# EAGLE board specMech - Copy (2) (EAGLE 9.6.2)
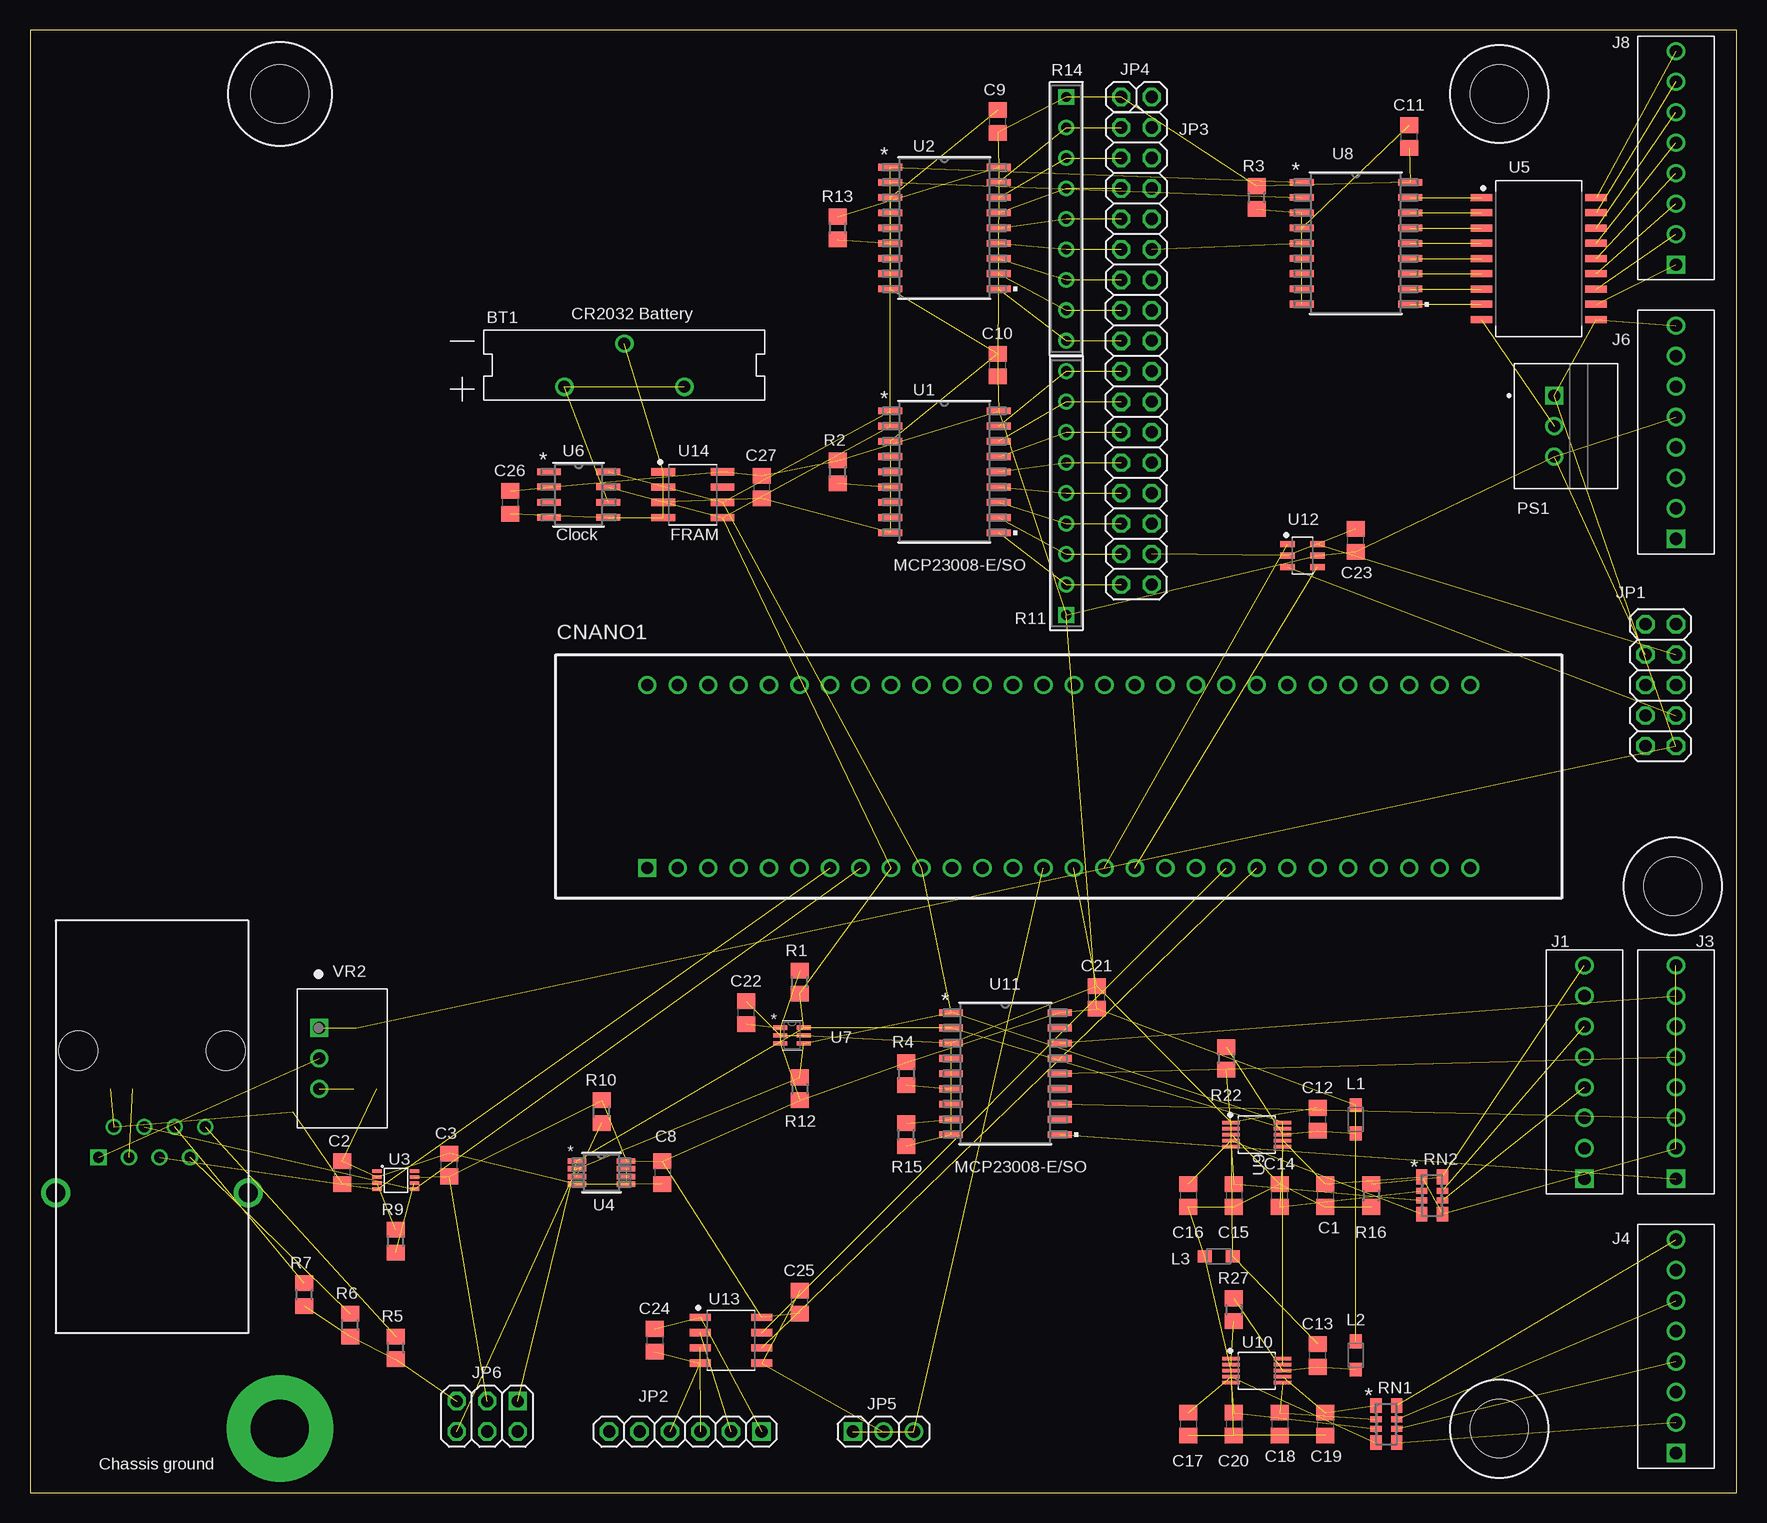
[diagram p0: board, top side]
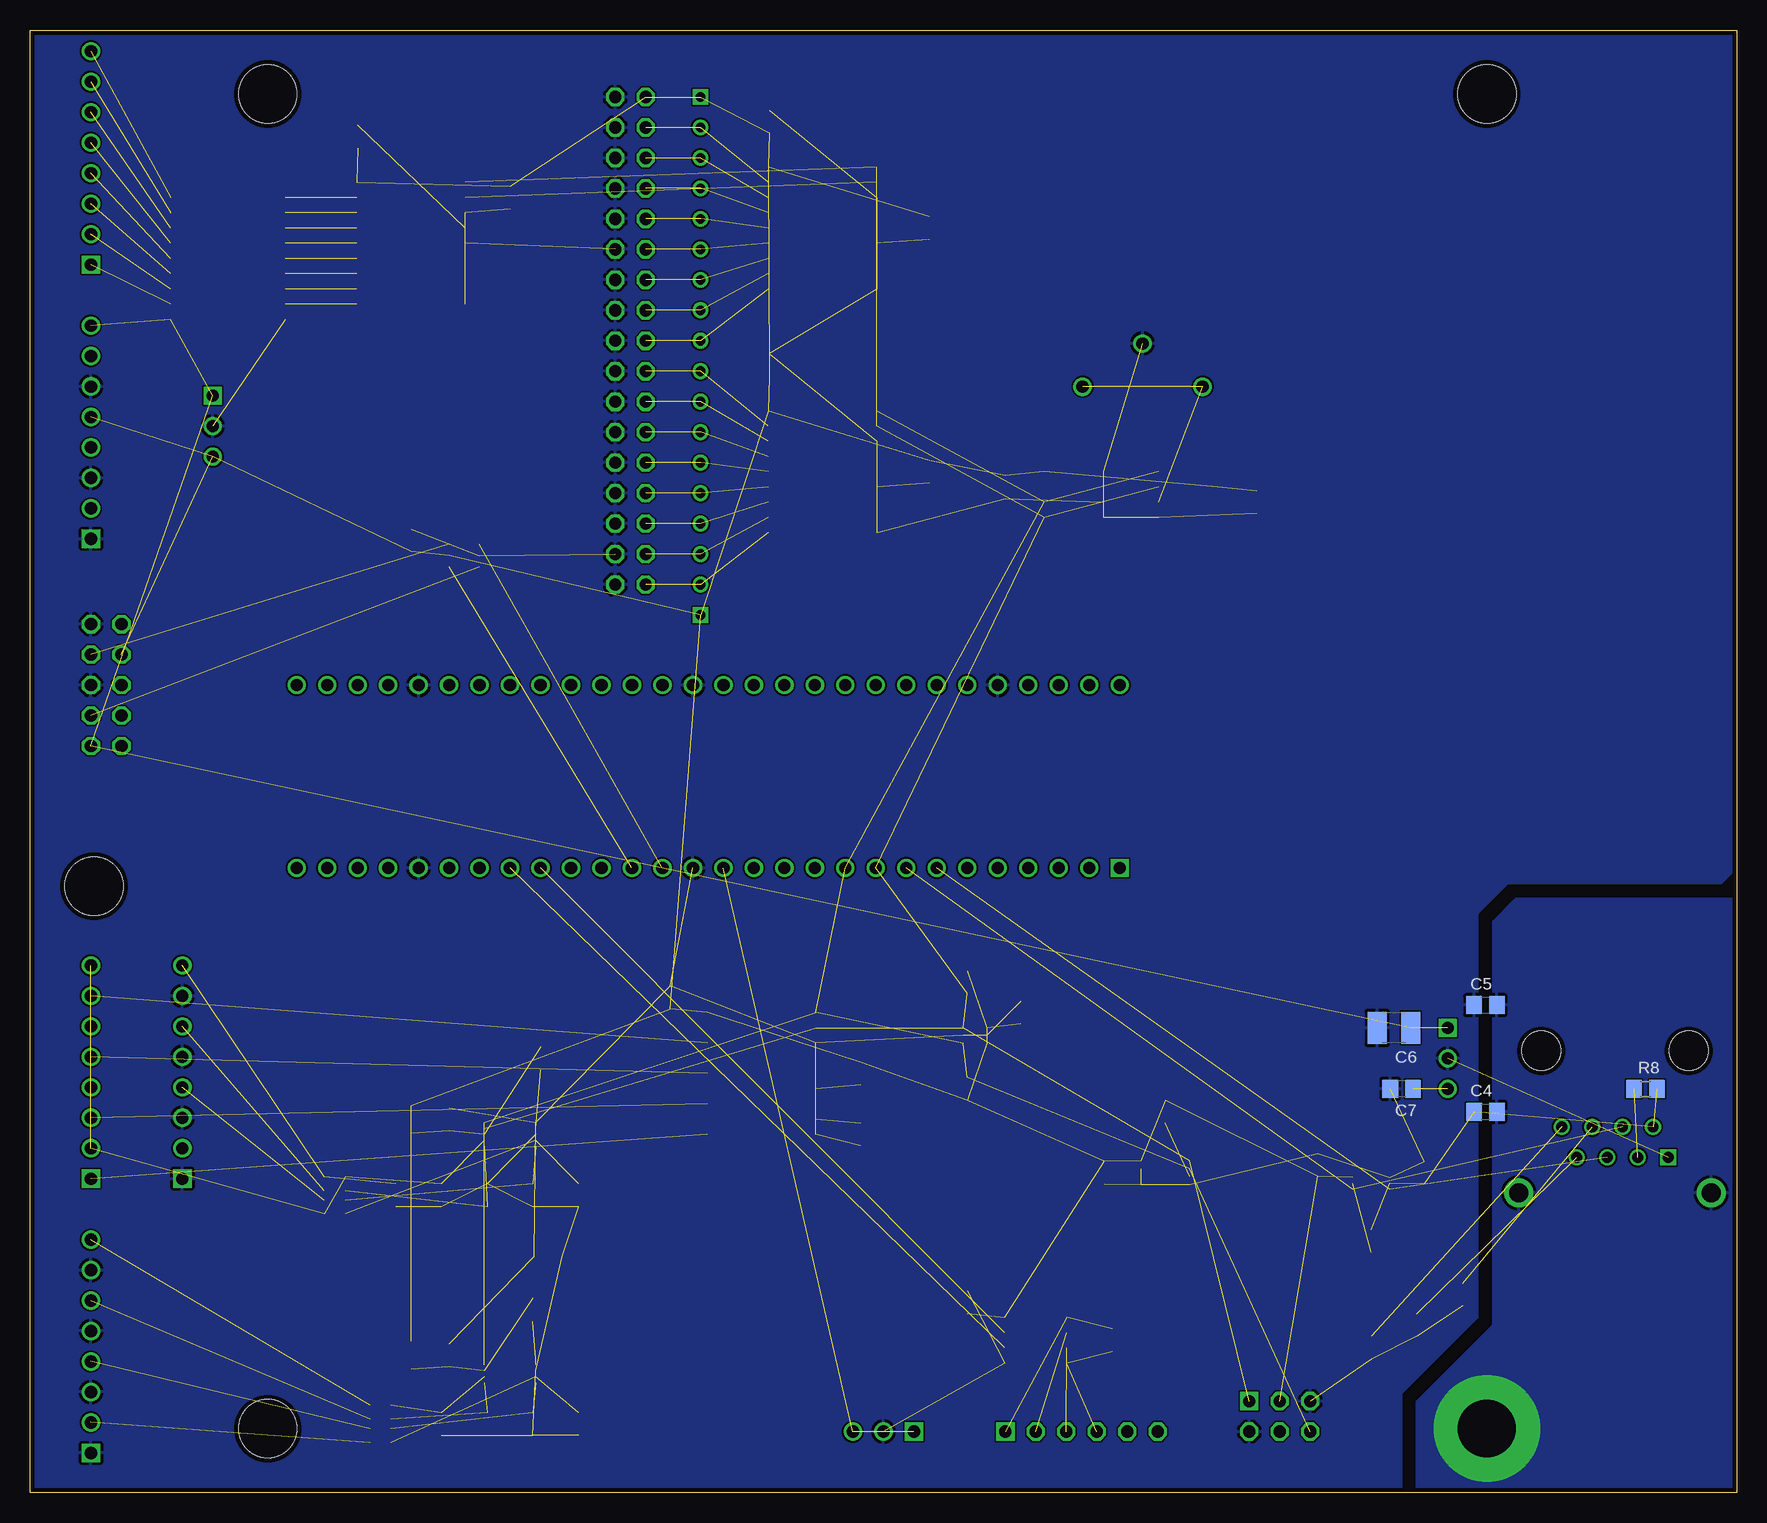
[diagram p1: board, bottom side, seen from below]

Size 142.24 x 121.92 mm. Coordinates in mm from the lower left corner, seen from the top.
Outline: 0,0 142.24,0 142.24,121.92 0,121.92 0,0
Copper layers (1*16): Top 0.035559375mm / dielectric 1.6mm / Bottom 0.035559375mm
Design rules "oshpark-2layer": minimum track width 6mil, minimum drill 10mil, track to track 6mil, track to pad 6mil, pad to pad 6mil, via to via 6mil, smd to smd 6mil, copper to edge 15mil, drill to drill 6mil, minimum pad ring 5mil, minimum via ring 5mil, stop-mask expansion 2.5mil, vias tented up to drill 0mil, thermal gap 10mil
Holes 4.83 mm at 122.43,5.33 136.91,50.55 122.43,116.59 20.83,116.59
tKeepout: area 16,0.5 to 25.7,10.2
bKeepout: area 16,0.5 to 25.7,10.2

## Footprints (pad centres in the part's own frame; a part is rotated, then mirrored left to right if it is on the bottom)
BAT_BK-5058 = drill 1.02: - 0,1.8; S+1 -5,-1.8; S+2 5,-1.8
C0805 = smd 1.3 x 1.5: 1 -0.95,0; 2 0.95,0
C1210 = smd 1.6 x 2.7: 1 -1.4,0; 2 1.4,0
CURIOSITYNANO4809 = drill 1.016: GND15 -7.62,-1.27; GND24 -7.62,-24.13; GND33 7.62,-24.13; GND42 7.62,-1.27; GND52 7.62,24.13; ID -7.62,31.75; PA0-TX -7.62,19.05; PA1-RX -7.62,16.51; PA2-SDA -7.62,13.97; PA3-SCL -7.62,11.43; PA4-MOSI -7.62,8.89; PA5-MISO -7.62,6.35; PA6-SCK -7.62,3.81; PA7-SS -7.62,1.27; PB0-RX -7.62,29.21; PB0-TX -7.62,-13.97; PB1-RX -7.62,-16.51; PB1-TX -7.62,26.67; PB2 -7.62,-19.05; PB3 -7.62,-21.59; PB4 7.62,-21.59; PB5 7.62,-19.05; PC0-TX -7.62,-3.81; PC1-RX -7.62,-6.35; PC2 -7.62,-8.89; PC3 -7.62,-11.43; PC4 7.62,-11.43; PC5 7.62,-8.89; PC6 7.62,-6.35; PC7 7.62,-3.81; PD0-AIN0 7.62,1.27; PD1-AIN1 7.62,3.81; PD2-AIN2 7.62,6.35; PD3-AIN3 7.62,8.89; PD4-AIN4 7.62,11.43; PD5-AIN5 7.62,13.97; PD6-AIN6 7.62,16.51; PD7-AIN7 7.62,19.05; PE0 -7.62,-26.67; PE1 -7.62,-29.21; PE2 -7.62,-31.75; PE3 -7.62,-34.29; PF0-TOSC1 7.62,-16.51; PF1-TOSC2 7.62,-13.97; PF2 7.62,-34.29; PF2-6 -7.62,21.59; PF3 7.62,-31.75; PF3-5 -7.62,24.13; PF4 7.62,-29.21; PF5-LED 7.62,-26.67; PF6-SW0 7.62,29.21; UPDI 7.62,26.67; VBUS 7.62,34.29; VOFF 7.62,31.75; VTG 7.62,21.59 | drill 1.016 square: NC -7.62,34.29
1X08-MOLEX-SHROUD = drill 1.016 square: P$1 0,8.89 | drill 1.016: P$2 0,6.35; P$3 0,3.81; P$4 0,1.27; P$5 0,-1.27; P$6 0,-3.81; P$7 0,-6.35; P$8 0,-8.89
XPORT-2 = drill 0.9: 3.3V 0,-3.175; /RST 2.54,-1.905; CP1 0,1.905; CP2 2.54,3.175; CP3 0,4.445; RX 2.54,0.635; TX 0,-0.635 | drill 0.9 square: GND 2.54,-4.445 | drill 1.6: P$1 5.5,8.025; P$2 5.5,-8.025 | hole 3.25: -6.35,6.15; -6.35,-6.15
2X05 = drill 1.016 octagon: 1 -5.08,-1.27; 2 -5.08,1.27; 3 -2.54,-1.27; 4 -2.54,1.27; 5 0,-1.27; 6 0,1.27; 7 2.54,-1.27; 8 2.54,1.27; 9 5.08,-1.27; 10 5.08,1.27
1X06 = drill 1.016 square: 1 -6.35,0 | drill 1.016 octagon: 2 -3.81,0; 3 -1.27,0; 4 1.27,0; 5 3.81,0; 6 6.35,0
2X16 = drill 1.016 octagon: 1 -19.05,-1.27; 2 -19.05,1.27; 3 -16.51,-1.27; 4 -16.51,1.27; 5 -13.97,-1.27; 6 -13.97,1.27; 7 -11.43,-1.27; 8 -11.43,1.27; 9 -8.89,-1.27; 10 -8.89,1.27; 11 -6.35,-1.27; 12 -6.35,1.27; 13 -3.81,-1.27; 14 -3.81,1.27; 15 -1.27,-1.27; 16 -1.27,1.27; 17 1.27,-1.27; 18 1.27,1.27; 19 3.81,-1.27; 20 3.81,1.27; 21 6.35,-1.27; 22 6.35,1.27; 23 8.89,-1.27; 24 8.89,1.27; 25 11.43,-1.27; 26 11.43,1.27; 27 13.97,-1.27; 28 13.97,1.27; 29 16.51,-1.27; 30 16.51,1.27; 31 19.05,-1.27; 32 19.05,1.27
1X02 = drill 1.016 octagon: 1 -1.27,0; 2 1.27,0
1X03 = drill 1.016 square: 1 -2.54,0 | drill 1.016: 2 0,0; 3 2.54,0
2X03 = drill 1.016 square: 1 -2.54,-1.27 | drill 1.016 octagon: 2 -2.54,1.27; 3 0,-1.27; 4 0,1.27; 5 2.54,-1.27; 6 2.54,1.27
INDC2012X87N = smd 1.15 x 1: 1 -1.175,0; 2 1.175,0
CONV_OKI-78SR-5/1.5-W36-C = drill 1 pad 1.5 square: 1 -2.54,0 | drill 1 pad 1.5: 2 0,0; 3 2.54,0
R0805 = smd 1.3 x 1.5: 1 -0.95,0; 2 0.95,0
BO_4609X = drill 0.813 pad 1.321 square: 1 0,0 | drill 0.813 pad 1.321: 2 2.54,0; 3 5.08,0; 4 7.62,0; 5 10.16,0; 6 12.7,0; 7 15.24,0; 8 17.78,0; 9 20.32,0
EXB38V_PAN = smd 0.94 x 1.219: 1 -0.864,1.549; 4 -0.864,-1.549; 5 0.864,-1.549; 8 0.864,1.549 | smd 0.94 x 0.508: 2 -0.864,0.394; 3 -0.864,-0.406; 6 0.864,-0.406; 7 0.864,0.394
SOIC18-W_MC = smd 1.981 x 0.559: 1 -4.521,5.08; 2 -4.521,3.81; 3 -4.521,2.54; 4 -4.521,1.27; 5 -4.521,0; 6 -4.521,-1.27; 7 -4.521,-2.54; 8 -4.521,-3.81; 9 -4.521,-5.08; 10 4.521,-5.08; 11 4.521,-3.81; 12 4.521,-2.54; 13 4.521,-1.27; 14 4.521,0; 15 4.521,1.27; 16 4.521,2.54; 17 4.521,3.81; 18 4.521,5.08
GHI-IC_VSSOP8(TI) = smd 0.8 x 0.3: 1 -1.55,0.75; 2 -1.55,0.25; 3 -1.55,-0.25; 4 -1.55,-0.75; 5 1.55,-0.75; 6 1.55,-0.25; 7 1.55,0.25; 8 1.55,0.75
MSOP8_MC_MCH = smd 1.524 x 0.457: 1 -2.045,0.975; 2 -2.045,0.325; 3 -2.045,-0.325; 4 -2.045,-0.975; 5 2.045,-0.975; 6 2.045,-0.325; 7 2.045,0.325; 8 2.045,0.975
SOIC127P1030X245-18 = smd 1.765 x 0.589: 1 -4.773,5.08; 2 -4.773,3.81; 3 -4.773,2.54; 4 -4.773,1.27; 5 -4.773,0; 6 -4.773,-1.27; 7 -4.773,-2.54; 8 -4.773,-3.81; 9 -4.773,-5.08; 10 4.773,-5.08; 11 4.773,-3.81; 12 4.773,-2.54; 13 4.773,-1.27; 14 4.773,0; 15 4.773,1.27; 16 4.773,2.54; 17 4.773,3.81; 18 4.773,5.08
21-0041B_8 = smd 1.981 x 0.533: 1 -2.464,1.905; 2 -2.464,0.635; 3 -2.464,-0.635; 4 -2.464,-1.905; 5 2.464,-1.905; 6 2.464,-0.635; 7 2.464,0.635; 8 2.464,1.905
SOT-6_SC_LIT = smd 1.171 x 0.351: 1 -0.97,0.65; 2 -0.97,0; 3 -0.97,-0.65; 4 0.97,-0.65; 5 0.97,0; 6 0.97,0.65
SOP50P490X110-10N = smd 1.471 x 0.28: 1 -2.15,1; 2 -2.15,0.5; 3 -2.15,0; 4 -2.15,-0.5; 5 -2.15,-1; 6 2.15,-1; 7 2.15,-0.5; 8 2.15,0; 9 2.15,0.5; 10 2.15,1
SOP95P275X110-6 = smd 1.224 x 0.497: 1 -1.244,0.95; 2 -1.244,0; 3 -1.244,-0.95; 4 1.244,-0.95; 5 1.244,0; 6 1.244,0.95
SOIC127P599X175-8N = smd 1.751 x 0.599: 1 -2.578,1.905; 2 -2.578,0.635; 3 -2.578,-0.635; 4 -2.578,-1.905; 5 2.578,-1.905; 6 2.578,-0.635; 7 2.578,0.635; 8 2.578,1.905
SOIC127P600X175-8 = smd 1.968 x 0.602: 1 -2.473,1.905; 2 -2.473,0.635; 3 -2.473,-0.635; 4 -2.473,-1.905; 5 2.473,-1.905; 6 2.473,-0.635; 7 2.473,0.635; 8 2.473,1.905
CONV_P7805-Q24-S3-S = drill 1: GND 0,-1.95; VOUT 2.54,-1.95 | drill 1 square: VIN -2.54,-1.95

## Placement (x,y rotation side)
BT1  CR2032-BATT-BK-5058  [BAT_BK-5058]  49.53,93.98 0 top
C1  0.01uF  [C0805]  107.95,24.77 270 top
C2  0.1uF  [C0805]  26.04,26.67 90 top
C3  0.1uF  [C0805]  34.92,27.3 90 top
C4  0.01uF  [C0805]  20.95,31.75 0 bottom
C5  0.01uF  [C0805]  20.95,40.64 0 bottom
C6  10uF 50V  [C1210]  28.57,38.73 180 bottom
C7  10uF 6V3  [C0805]  27.94,33.66 180 bottom
C8  0.1uF  [C0805]  52.7,26.67 270 top
C9  0.1uF  [C0805]  80.64,114.3 90 top
C10  0.1uF  [C0805]  80.64,93.98 90 top
C11  0.1uF  [C0805]  114.94,113.03 90 top
C12  0.1uF  [C0805]  107.31,31.11 90 top
C13  0.1uF  [C0805]  107.31,11.43 90 top
C14  0.01uF  [C0805]  104.14,24.77 90 top
C15  0.01uF  [C0805]  100.33,24.77 270 top
C16  0.01uF  [C0805]  96.52,24.77 270 top
C17  0.01uF  [C0805]  96.52,5.71 270 top
C18  0.01uF  [C0805]  104.14,5.71 270 top
C19  0.01uF  [C0805]  107.95,5.71 270 top
C20  0.01uF  [C0805]  100.33,5.71 270 top
C21  0.1uF  [C0805]  88.9,41.27 90 top
C22  0.1uF  [C0805]  59.69,40.01 90 top
C23  0.1uF  [C0805]  110.49,79.38 90 top
C24  0.1uF  [C0805]  52.07,12.7 270 top
C25  0.1uF  [C0805]  64.14,15.88 90 top
C26  0.1uF  [C0805]  40.01,82.55 270 top
C27  0.1uF  [C0805]  60.96,83.82 270 top
CNANO1  CURIOSITYNANO4809  [CURIOSITYNANO4809]  85.72,59.69 90 top
J1  PINHD-1X8-MOLEX-SHROUD  [1X08-MOLEX-SHROUD]  129.54,35.05 180 top
J2  Molex 0022232081  [1X08-MOLEX-SHROUD]  -20.32,104.14 90 top  (outside the outline)
J3  PINHD-1X8-MOLEX-SHROUD  [1X08-MOLEX-SHROUD]  137.16,35.05 180 top
J4  PINHD-1X8-MOLEX-SHROUD  [1X08-MOLEX-SHROUD]  137.16,12.19 180 top
J5  XPORT  [XPORT-2]  10.16,30.48 270 top
J6  Molex 0022232081  [1X08-MOLEX-SHROUD]  137.16,88.39 180 top
J7  Molex 0022232081  [1X08-MOLEX-SHROUD]  -20.32,93.98 90 top  (outside the outline)
J8  Molex 0022232081  [1X08-MOLEX-SHROUD]  137.16,111.25 180 top
JP1  [2X05]  135.89,67.31 90 top
JP2  [1X06]  54.61,5.08 180 top
JP3  [2X16]  92.2,94.74 270 top
JP4  [1X02]  92.2,116.33 0 top
JP5  [1X03]  71.12,5.08 0 top
JP6  [2X03]  38.1,6.35 180 top
L1  MMZ2012Y152BT000  [INDC2012X87N]  110.49,31.11 90 top
L2  MMZ2012Y152BT000  [INDC2012X87N]  110.49,11.43 90 top
L3  MMZ2012Y152BT000  [INDC2012X87N]  99.06,19.68 180 top
PS1  OKI-78SR-5/1.5-W36-C  [CONV_OKI-78SR-5/1.5-W36-C]  127,88.9 270 top
R1  10K  [R0805]  64.14,42.55 90 top
R2  10K  [R0805]  67.31,85.09 90 top
R3  10K  [R0805]  102.23,107.95 90 top
R4  10K  [R0805]  73.03,34.92 270 top
R5  10K  [R0805]  30.48,12.06 90 top
R6  10K  [R0805]  26.67,13.97 90 top
R7  10K  [R0805]  22.86,16.51 90 top
R8  10K  [R0805]  7.62,33.66 0 bottom
R9  10K  [R0805]  30.48,20.95 90 top
R10  [R0805]  47.62,31.75 90 top
R11  4609X-101-103LF  [BO_4609X]  86.36,73.15 90 top
R12  10K  [R0805]  64.14,33.66 270 top
R13  10K  [R0805]  67.31,105.41 90 top
R14  10K  [BO_4609X]  86.36,116.33 270 top
R15  10K  [R0805]  73.03,29.84 90 top
R16  *1K*  [R0805]  111.76,24.77 270 top
R22  10K  [R0805]  99.69,36.2 270 top
R27  10K  [R0805]  100.33,15.24 270 top
RN1  EXB-38V103JV  [EXB38V_PAN]  113.03,5.71 0 top
RN2  EXB-38V103JV  [EXB38V_PAN]  116.84,24.77 0 top
U1  MCP23008-E/SO  [SOIC18-W_MC]  76.2,85.09 0 top
U2  MCP23008-E/SO  [SOIC18-W_MC]  76.2,105.41 0 top
U3  TXB0102DCURVSSOP8  [GHI-IC_VSSOP8(TI)]  30.48,26.04 0 top
U4  MCP9808-E/MS  [MSOP8_MC_MCH]  47.62,26.67 0 top
U5  TBD62083  [SOIC127P1030X245-18]  125.73,102.87 0 top
U6  DS3231MZ+  [21-0041B_8]  45.72,83.19 0 top
U7  LTC4311ISC6TRPBF  [SOT-6_SC_LIT]  63.5,38.1 0 top
U8  MCP23008-E/SO  [SOIC18-W_MC]  110.49,104.14 0 top
U9  ADS1115  [SOP50P490X110-10N]  102.23,29.84 0 top
U10  ADS1115  [SOP50P490X110-10N]  102.23,10.16 0 top
U11  MCP23008-E/SO  [SOIC18-W_MC]  81.28,34.92 0 top
U12  74HC2G17TSSOP-6  [SOP95P275X110-6]  106.05,78.11 0 top
U13  ISO7421DR  [SOIC127P599X175-8N]  58.42,12.7 0 top
U14  MB85RC256  [SOIC127P600X175-8]  55.24,83.19 0 top
VR2  P7805-Q24-S3-S  [CONV_P7805-Q24-S3-S]  26.04,36.2 270 top

## Library data of the parts
BT1 = AUmlib; DESCRIPTION: Holder Coin Cell Batt Vert Mnt; MF: MPD (Memory; MP: BK-5058; PACKAGE: None; PURCHASE-URL: https://pricing.snapeda.com/search/part/BK-5058/?ref=eda
C1-C27 = AUmlib; SPICEPREFIX: C
CNANO1 J1-J8 JP1-JP6 U3 U5 U9 U10 U12-U14 = AUmlib
L1-L3 = AUmlib; DESCRIPTION: 1.5 kOhms @ 100MHz 1 Signal Line Ferrite Bead 0805 (2012 Metric) 500mA 400mOhm; MF: TDK; MP: MMZ2012Y152BT000; PACKAGE: 0805 TDK; PURCHASE-URL: https://pricing.snapeda.com/search/part/MMZ2012Y152BT000/?ref=eda
PS1 = AUmlib; DESCRIPTION: Linear Regulator Replacement DC DC Converter 1 Output 5V 1.5A 7V - 36V Input; DIGI-KEY_PART_NUMBER: 811-2196-5-ND; MF: Murata Power Solutions Inc.; MP: OKI-78SR-5/1.5-W36-C; PACKAGE: SIP-3 Murata Power; PURCHASE-URL: https://pricing.snapeda.com/search/part/OKI-78SR-5/1.5-W36-C/?ref=eda
R1-R10 R12 R13 R15 R16 R22 R27 = AUmlib; SPICEPREFIX: R
R11 R14 = AUmlib; MANUFACTURER_PART_NUMBER: 4609X101103LF; VENDOR: Bourns Electronics
RN1 RN2 = AUmlib; DESCRIPTION: 10k Ohm ±5% 62.5mW Power Per Element Isolated Resistor Network/Array ±200ppm/°C 1206 (3216 Metric), Convex, Long Side Terminals; DIGI-KEY_PART_NUMBER: Y9103CT-ND; MF: Panasonic; MP: EXB-38V103JV; PACKAGE: 1206 Panasonic; PURCHASE-URL: https://pricing.snapeda.com/search/part/EXB-38V103JV/?ref=eda
U1 U2 U8 U11 = AUmlib; BUILT_BY: EMA_UL_Team; MANUFACTURER_PART_NUMBER: MCP23008-E/SO; VENDOR: Microchip
U4 = AUmlib; BUILT_BY: EMA_UL_Team; MANUFACTURER_PART_NUMBER: MCP9808-E/MS; SOURCELIBRARY: Microchip_2014-11-20; VENDOR: Microchip
U6 = AUmlib; BUILT_BY: EMA_UL_Team; MANUFACTURER_PART_NUMBER: DS3231MZ+; VENDOR: Maxim Integrated Products
U7 = AUmlib; BUILT_BY: EMA_UL_Team; MANUFACTURER_PART_NUMBER: ltc4311isc6#trpbf; SOURCELIBRARY: LinearTech_2016_03_08; VENDOR: Linear Technology
VR2 = AUmlib; AVAILABILITY: Good; DESCRIPTION: 3.3V 2W; MF: CUI; MP: P7805-Q12-S1R5-S; PACKAGE: SIP-3 CUI; PRICE: $4.94

## Nets
3.3V: C7.1 VR2.VOUT
+3.3V: C2.1 C4.1 J5.3.3V R8.2 R9.2 U3.3
+5V: C3.1 C8.1 C9.1 C10.1 C11.1 C21.1 C22.1 C23.1 C25.1 C26.1 C27.1 J6.P$5 JP1.8 JP4.1 JP6.3 L1.2 L2.2 PS1.3 R1.2 R2.2 R3.2 R4.1 R10.2 R11.1 R12.2 R13.2 R14.1 U1.18 U2.18 U3.7 U4.8 U6.2 U7.1 U7.3 U8.18 U11.18 U12.5 U13.8 U14.8
+12V: C6.1 J6.P$8 JP1.1 PS1.1 U5.10 VR2.VIN
A0A: J1.P$8 R16.1 RN2.8
A0B: J4.P$8 RN1.8
A1A: J1.P$6 RN2.7
A1B: J4.P$6 RN1.7
A2A: J1.P$4 RN2.6
A2B: J4.P$4 RN1.6
A3A: C1.1 J3.P$2 J3.P$4 J3.P$6 J3.P$8 RN2.1 RN2.5 U9.7
A3B: J4.P$2 RN1.5
BEEP: CNANO1.PA7-SS JP5.1 JP5.3
CP1: J5.CP1 R7.2
CP2: J5.CP2 R6.2
CP3: J5.CP3 R5.2
GND: BT1.- C2.2 C3.2 C5.1 C6.2 C7.2 C8.2 C9.2 C10.2 C11.2 C12.2 C13.2 C21.2 C22.2 C23.2 C25.2 C26.2 C27.2 CNANO1.GND15 CNANO1.GND24 CNANO1.GND33 CNANO1.GND42 CNANO1.GND52 J1.P$1 J1.P$3 J1.P$5 J1.P$7 J4.P$1 J4.P$3 J4.P$5 J4.P$7 J5.GND J6.P$1 J6.P$3 J6.P$6 JP1.5 JP1.9 JP3.2 JP3.4 JP3.6 JP3.8 JP3.10 JP3.12 JP3.14 JP3.16 JP3.18 JP3.20 JP3.22 JP3.24 JP3.26 JP3.28 JP3.30 JP3.32 JP4.2 JP5.2 JP6.2 JP6.5 L3.1 PS1.2 R5.1 R6.1 R7.1 R15.1 U1.3 U1.4 U1.9 U2.3 U2.5 U2.9 U3.2 U4.4 U4.5 U4.6 U4.7 U5.9 U6.5 U7.2 U7.5 U8.4 U8.5 U8.9 U9.1 U11.3 U11.4 U11.5 U11.9 U12.2 U13.5 U14.1 U14.2 U14.3 U14.4 VR2.GND
GND-1: C4.2 C5.2 J5.P$1 J5.P$2
GND-ISO: C1.2 C14.2 C15.2 C16.2 C17.2 C18.2 C19.2 C20.2 L3.2 R16.2 U9.3 U10.3
INT-PNEU: U1.8
INT-SLIT: U2.8
LN-RX: CNANO1.PB0-TX U13.7
LN-TX: CNANO1.PB1-RX U13.6
N$1: JP3.1 R14.2 U2.17
N$2: JP3.3 R14.3 U2.16
N$3: JP3.5 R14.4 U2.15
N$4: JP3.7 R14.5 U2.14
N$5: R4.2 U11.6
N$6: C13.1 L2.1 R27.1 U10.8
N$7: C12.1 L1.1 R22.1 U9.8
N$8: JP1.3 U12.3
N$9: JP3.17 R11.9 U1.17
N$10: JP3.19 R11.8 U1.16
N$11: JP3.21 R11.7 U1.15
N$12: JP3.23 R11.6 U1.14
N$13: JP3.25 R11.5 U1.13
N$14: R2.1 U1.5 U1.6
N$15: JP3.29 R11.3 U1.11
N$16: JP3.31 R11.2 U1.10
N$17: JP3.11 R14.7 U2.12
N$18: R15.2 U11.8
N$19: JP1.7 U12.6
N$20: JP3.27 R11.4 U1.12
N$21: JP3.13 R14.8 U2.11
N$22: JP3.15 R14.9 U2.10
N$23: C24.1 JP2.1 U13.1
N$24: R13.1 U2.4 U2.6
N$25: JP2.2 U13.2
N$26: JP2.3 U13.3
N$27: C24.2 JP2.4 U13.4
N$36: JP3.9 R14.6 U2.13
N$37: U5.1 U8.17
N$38: U5.2 U8.16
N$39: U5.3 U8.15
N$43: R9.1 U3.6
N$44: U5.4 U8.14
N$45: U5.5 U8.13
N$46: U5.6 U8.12
N$47: U5.7 U8.11
N$48: U5.8 U8.10
N$49: R3.1 U8.3 U8.6
N$50: J8.P$8 U5.18
N$51: J8.P$1 U5.11
N$52: J8.P$2 U5.12
N$53: J8.P$3 U5.13
N$54: J8.P$4 U5.14
N$55: J8.P$5 U5.15
N$56: J8.P$6 U5.16
N$57: J8.P$7 U5.17
N$60: J3.P$1 U11.10
N$61: J3.P$3 U11.12
N$62: C16.1 RN2.4 U9.4
N$63: C15.1 RN2.3 U9.5
N$64: R22.2 U9.2
N$65: C19.1 RN1.1 U10.7
N$66: C14.1 RN2.2 U9.6
N$67: C18.1 RN1.2 U10.6
N$68: C20.1 RN1.3 U10.5
N$69: C17.1 RN1.4 U10.4
N$70: R27.2 U10.1 U10.2
N$71: J3.P$5 U11.14
N$72: J3.P$7 U11.16
OL/RST: JP6.4
RC-RX: CNANO1.PC0-TX U12.1
RC-TX: CNANO1.PC1-RX U12.4
RX: U3.8
SCL: CNANO1.PA3-SCL JP6.6 R12.1 U1.1 U2.1 U4.2 U6.8 U7.4 U8.1 U9.10 U10.10 U11.1 U14.6
SDA: CNANO1.PA2-SDA JP6.1 R1.1 U1.2 U2.2 U4.1 U6.7 U7.6 U8.2 U9.9 U10.9 U11.2 U14.5
T-ALERT: R10.1 U4.3
TX: U3.1
VBAT1: BT1.S+1 BT1.S+2 U6.6
XP-RX: CNANO1.PA0-TX J5.RX U3.4
XP-TX: CNANO1.PA1-RX J5.TX U3.5
XP/RST: J5./RST R8.1

## Tracks (layer width: path | path; a pad name or v marks a point on that pad's centre or on a via)
3.3V  (1 unrouted)
+3.3V  (5 unrouted)
+5V  (38 unrouted)
+12V  (5 unrouted)
A0A  (2 unrouted)
A0B  (1 unrouted)
A1A  (1 unrouted)
A1B  (1 unrouted)
A2A  (1 unrouted)
A2B  (1 unrouted)
A3A  (7 unrouted)
A3B  (1 unrouted)
BEEP  (2 unrouted)
CP1  (1 unrouted)
CP2  (1 unrouted)
CP3  (1 unrouted)
GND  (49 unrouted)
  pour Bottom: 27.94,8.26 21.59,14.61 21.59,48.26 19.05,50.8 1.27,50.8 0,52.07 0,121.92 142.24,121.92 142.24,0 27.94,0
GND-1  (via drill 4.83 pad 8.89)
  other vias: 20.83,5.33
  pour Bottom: 0,0 26.67,0 26.67,7.62 20.32,13.97 20.32,47.62 18.41,49.53 0,49.53
GND-ISO  (11 unrouted)
LN-RX  (1 unrouted)
LN-TX  (1 unrouted)
N$1  (2 unrouted)
N$2  (2 unrouted)
N$3  (2 unrouted)
N$4  (2 unrouted)
N$5  (1 unrouted)
N$6  (3 unrouted)
N$7  (3 unrouted)
N$8  (1 unrouted)
N$9  (2 unrouted)
N$10  (2 unrouted)
N$11  (2 unrouted)
N$12  (2 unrouted)
N$13  (2 unrouted)
N$14  (2 unrouted)
N$15  (2 unrouted)
N$16  (2 unrouted)
N$17  (2 unrouted)
N$18  (1 unrouted)
N$19  (1 unrouted)
N$20  (2 unrouted)
N$21  (2 unrouted)
N$22  (2 unrouted)
N$23  (2 unrouted)
N$24  (2 unrouted)
N$25  (1 unrouted)
N$26  (1 unrouted)
N$27  (2 unrouted)
N$36  (2 unrouted)
N$37  (1 unrouted)
N$38  (1 unrouted)
N$39  (1 unrouted)
N$43  (1 unrouted)
N$44  (1 unrouted)
N$45  (1 unrouted)
N$46  (1 unrouted)
N$47  (1 unrouted)
N$48  (1 unrouted)
N$49  (2 unrouted)
N$50  (1 unrouted)
N$51  (1 unrouted)
N$52  (1 unrouted)
N$53  (1 unrouted)
N$54  (1 unrouted)
N$55  (1 unrouted)
N$56  (1 unrouted)
N$57  (1 unrouted)
N$60  (1 unrouted)
N$61  (1 unrouted)
N$62  (2 unrouted)
N$63  (2 unrouted)
N$64  (1 unrouted)
N$65  (2 unrouted)
N$66  (2 unrouted)
N$67  (2 unrouted)
N$68  (2 unrouted)
N$69  (2 unrouted)
N$70  (2 unrouted)
N$71  (1 unrouted)
N$72  (1 unrouted)
RC-RX  (1 unrouted)
RC-TX  (1 unrouted)
SCL  (12 unrouted)
SDA  (12 unrouted)
T-ALERT  (1 unrouted)
VBAT1  (2 unrouted)
XP-RX  (2 unrouted)
XP-TX  (2 unrouted)
XP/RST  (1 unrouted)

## Text on the board
tPlace: CR2032 Battery | Clock | FRAM | Chassis ground